# EAGLE board Pololu Magnetic Encoder (Floating) Motor Mount (EAGLE 6.4)
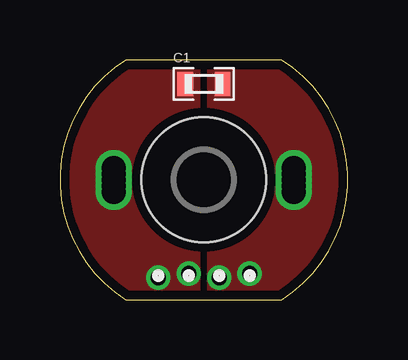
[diagram p0: board, top side]
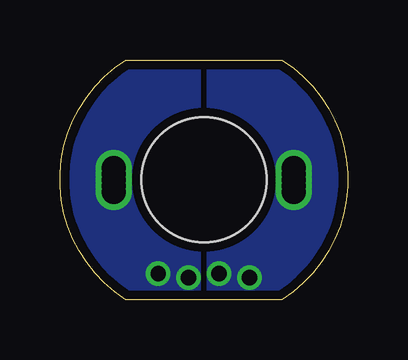
[diagram p1: board, bottom side, seen from below]

Size 11.99 x 10 mm. Coordinates in mm from the lower left corner, seen from the top.
Outline: 2.74,0 9.24,0 arc115 9.24,10 2.74,10 arc115 2.74,0
Copper layers (1*16): Top 0.0356mm / dielectric 1.5011mm / Bottom 0.0356mm
Design rules "OSHPark": minimum track width 6mil, minimum drill 13mil, track to track 6mil, track to pad 6mil, pad to pad 6mil, via to via 6mil, smd to smd 6mil, copper to edge 15mil, drill to drill 6mil, minimum pad ring 7mil, minimum via ring 7mil, stop-mask expansion 4mil, vias tented up to drill 16mil, thermal gap 10mil
Holes 5.2 mm at 5.99,5

## Footprints (pad centres in the part's own frame; a part is rotated, then mirrored left to right if it is on the bottom)
0603 = smd 0.65 x 1: 1 -0.775,0; 2 0.775,0
1X4.LOCK = drill 0.635 pad 1.016: 1 0,-0.08; 2 1.27,0.08; 3 2.54,-0.08; 4 3.81,0.08

## Placement (x,y rotation side)
C1  .1uF  [0603]  5.99,9 0 top
U$1  1X4.LOCK  [1X4.LOCK]  4.09,1 0 top

## Library data of the parts
C1 = standardparts
U$1 = headers(.05in)

## Nets
M+: C1.1 U$1.1 U$1.2
M-: C1.2 U$1.3 U$1.4

## Tracks (layer width: path | path; a pad name or v marks a point on that pad's centre or on a via)
M+  (via drill 1)
  other vias: 2.24,5 2.24,5.25 2.24,5.5 2.24,4.75 2.24,4.5
  pour Top (no thermals): -0.01,0 5.74,0 5.74,10 -0.01,10
  pour Bottom (no thermals): -0.01,0 5.74,0 5.74,10 -0.01,10
M-  (via drill 1)
  other vias: 9.74,5 9.74,4.75 9.74,4.5 9.74,5.25 9.74,5.5
  pour Bottom (no thermals): 6.24,0 11.99,0 11.99,10 6.24,10
  pour Top (no thermals): 6.24,0 11.99,0 11.99,10 6.24,10

## Text on the board
tDocu: + | -
bDocu: + | -